# Altium PCB final test with protection.PcbDoc
Units mm, origin at the board's own origin, x right, y up, seen from the top; angles counter-clockwise.
Board outline 152.4 x 101.6 mm, 2 copper layers (Top Layer, Bottom Layer); 19 components, 30 nets, 84 pads, 0 vias.
Unrouted connection lines stored in the file: 53.
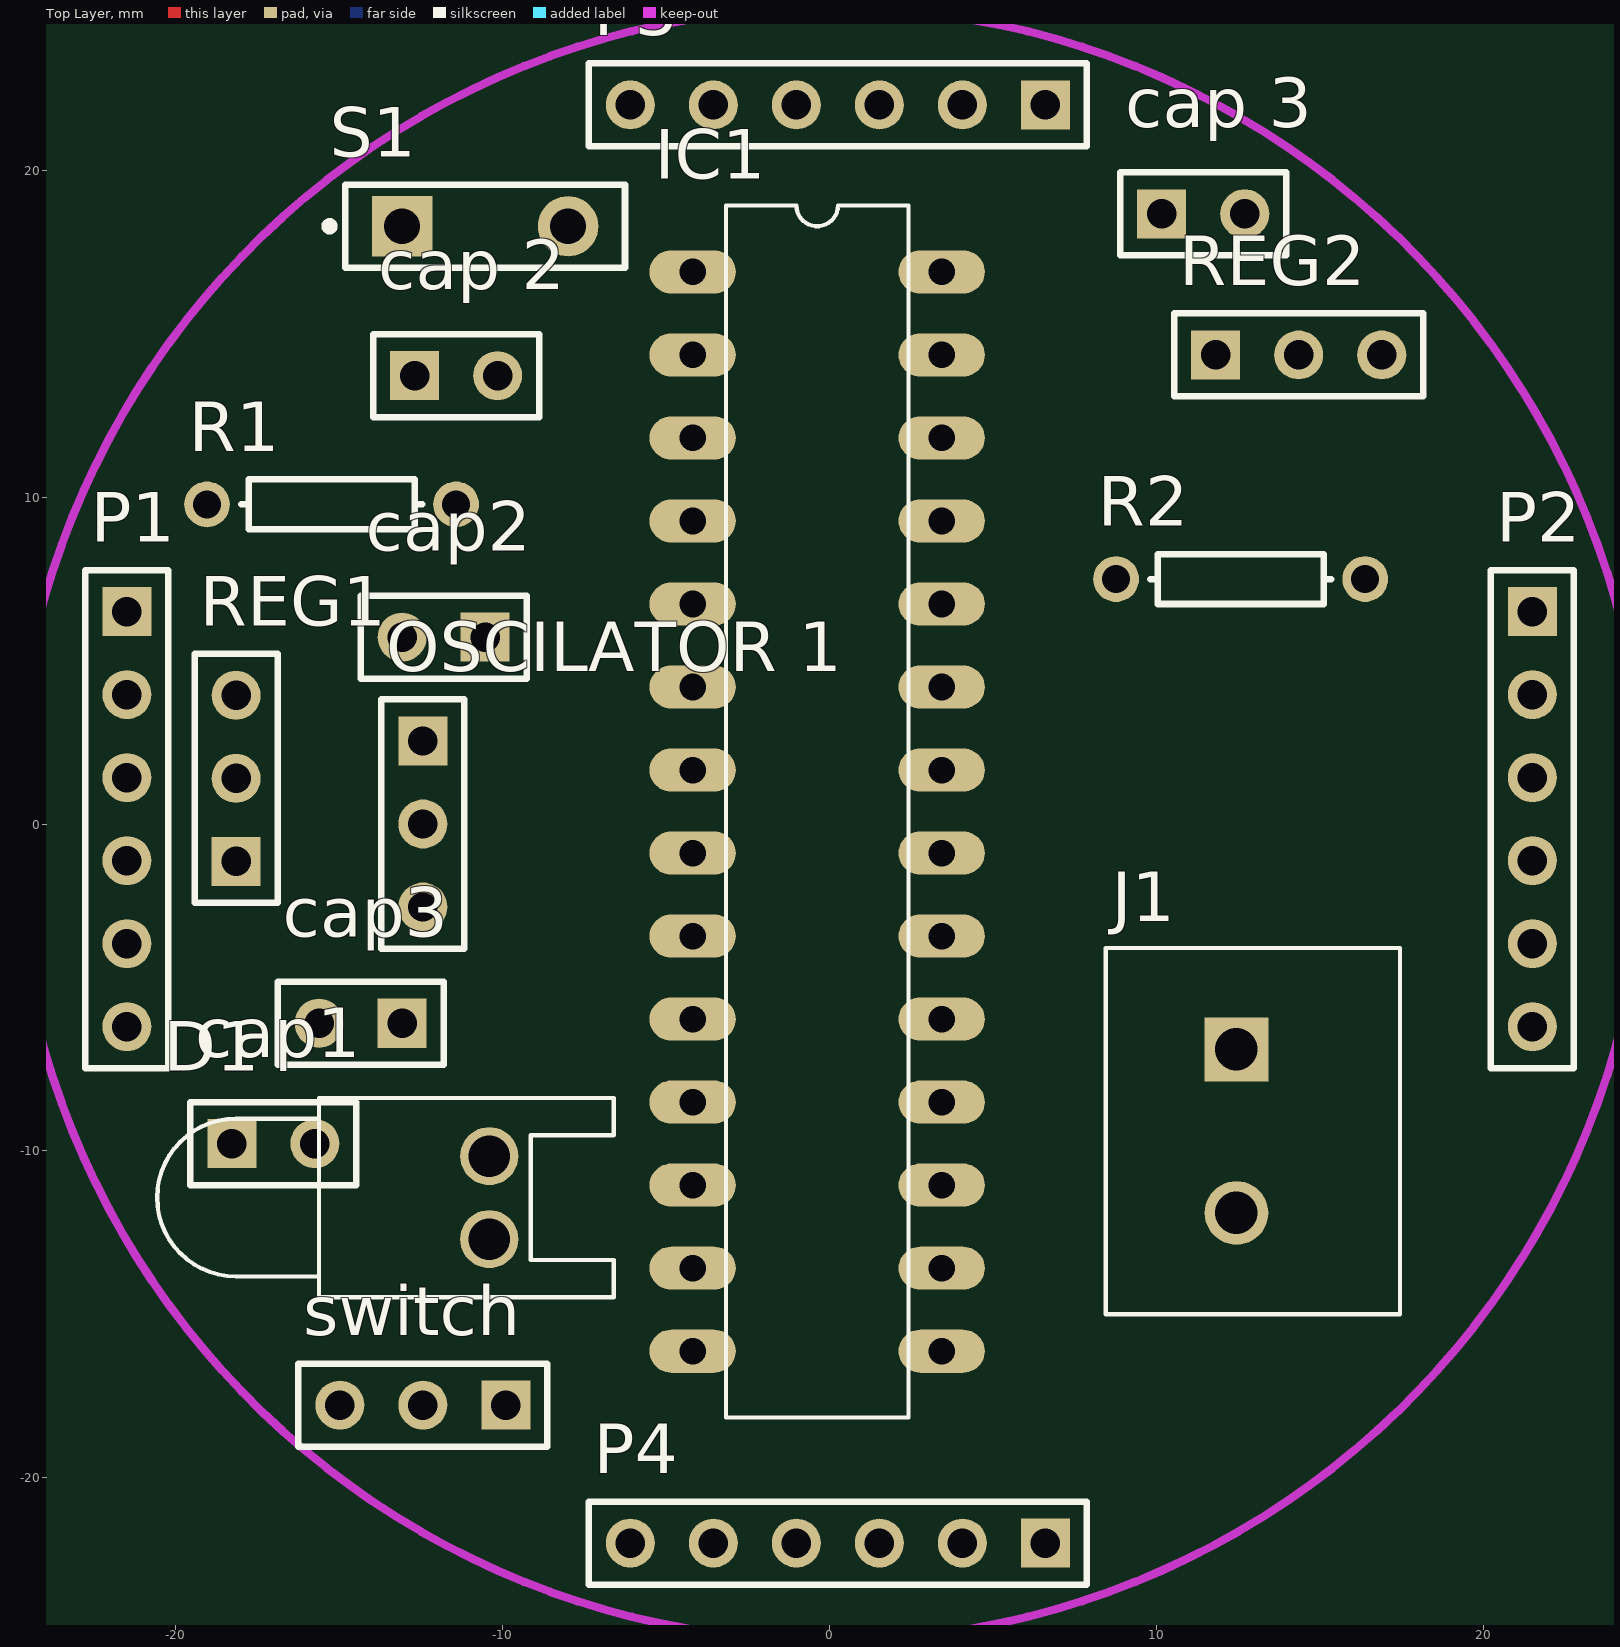
[diagram p0: Top Layer view]
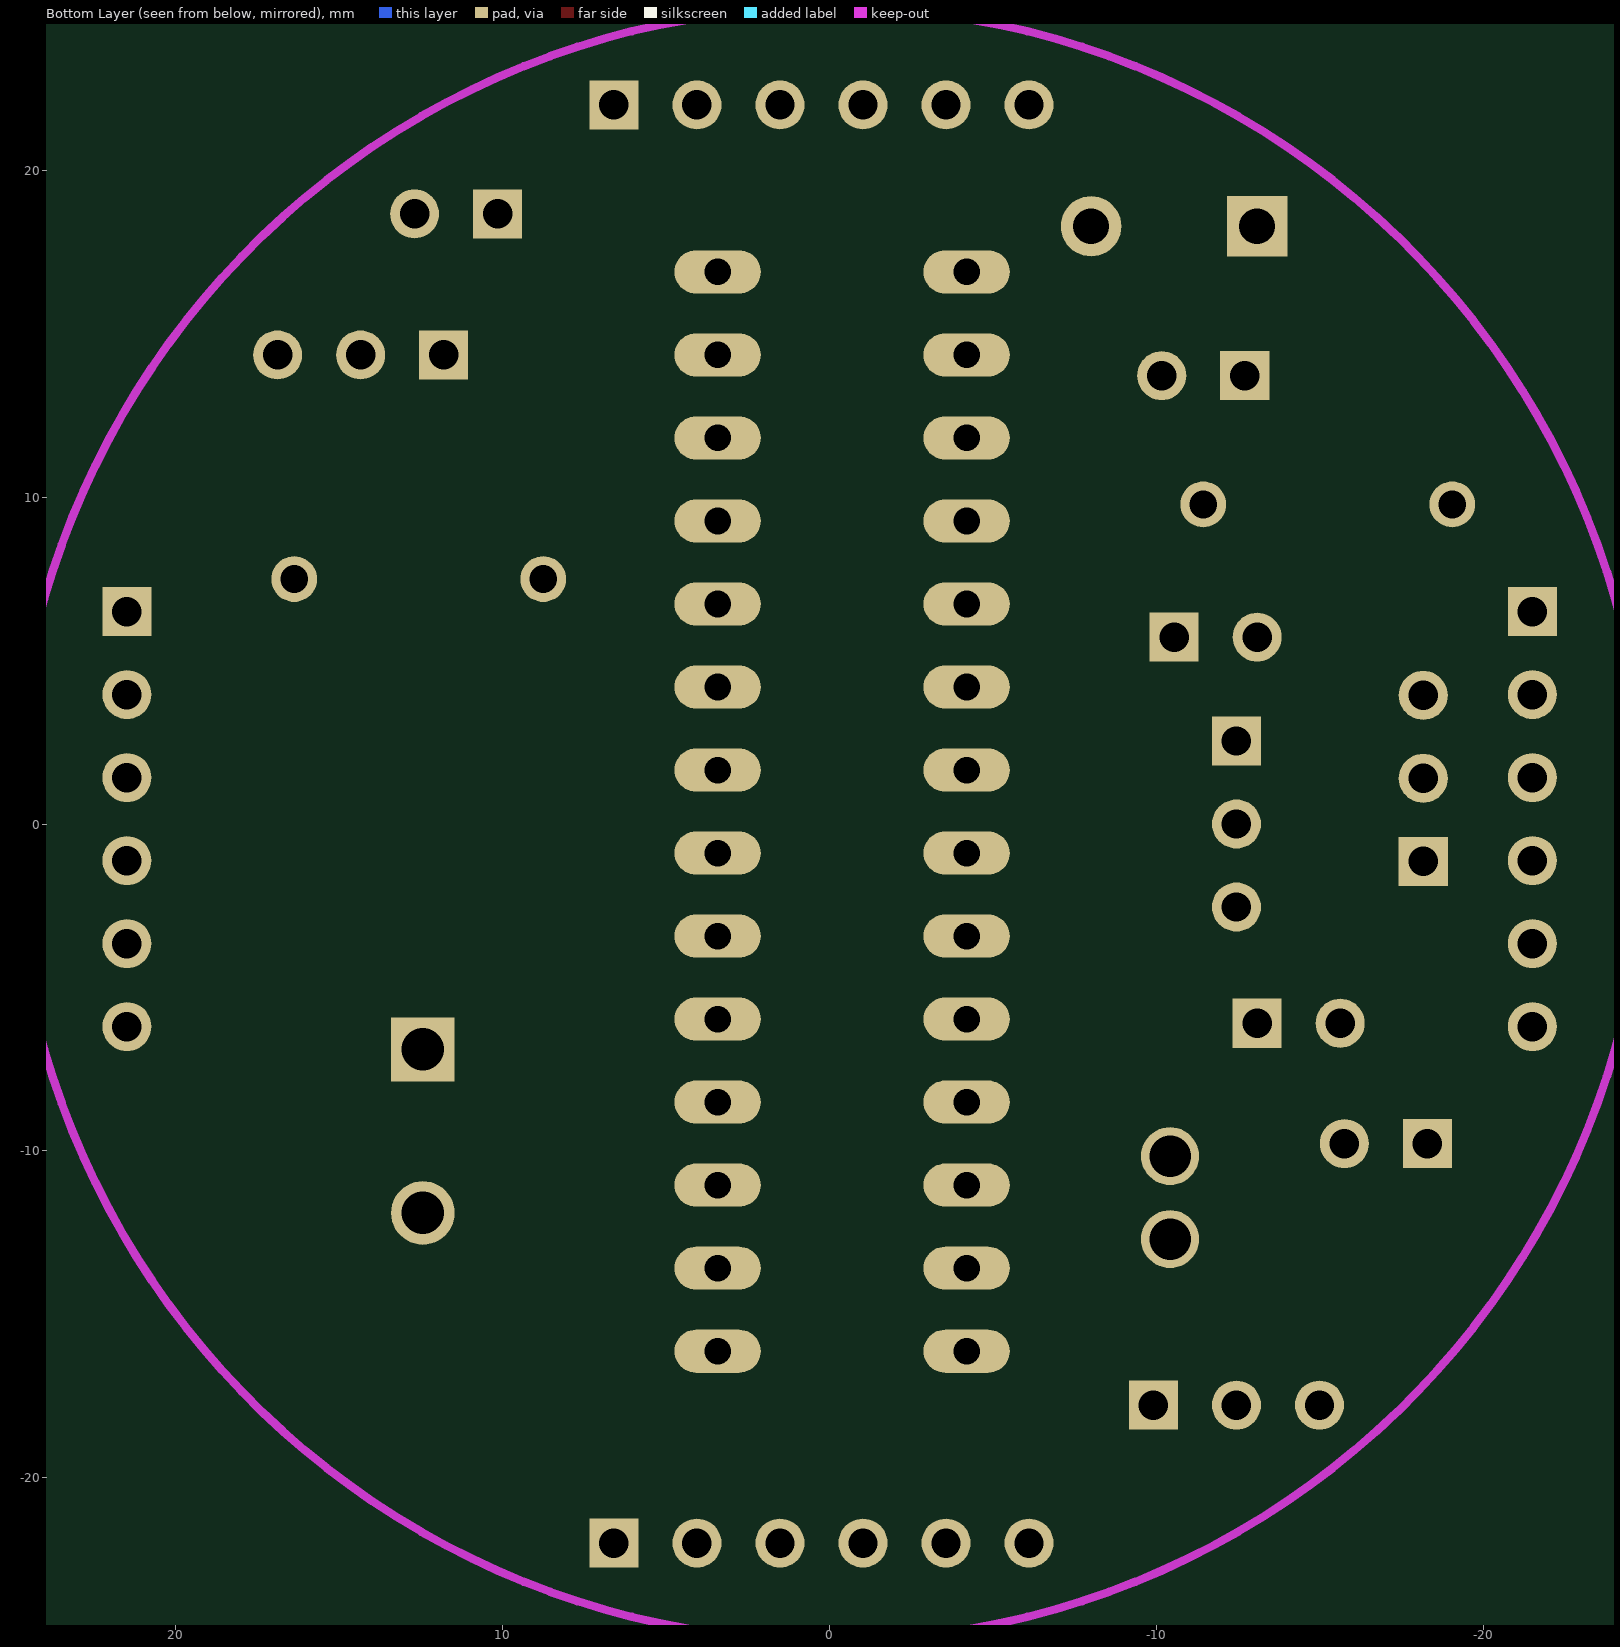
[diagram p1: Bottom Layer view, seen from below]

## Layer stack, top to bottom
Top Solder: solder mask 0.0102, Solder Resist, Dk 3.5
Top Layer: signal copper 0.036
Dielectric 1: dielectric 0.32, FR-4, Dk 4.8
Bottom Layer: signal copper 0.0356
Bottom Solder: solder mask 0.0102, Solder Resist, Dk 3.5

## Board outline
-74.168,-49.911 78.232,-49.911 78.232,51.689 -74.168,51.689

## Design rules (kind name [scope] priority, off if disabled: settings)
Clearance [All] p1: gap=0.5 ignorepadtopadclearanceinfootprint=FALSE
PolygonConnect [All] p1: connectstyle=Relief reliefconductorwidth=0.254 reliefentries=4 polygonreliefangle="90 Angle" airgapwidth=0.254
RoutingVias [All] p1: holewidth=0.711 width=1.27 viastyle="Through Hole" minholewidth=0.711 minwidth=1.27 maxholewidth=0.711 maxwidth=1.27
SolderMaskExpansion [All] p1: expansion=0.102
Width [All] p1: maxlimit=1 minlimit=0.5 preferedwidth=0.7
30 further rules are at their usual default settings.

## Components (designator, comment, footprint, x,y, rotation, side; value= is the part's Value field where it differs from the comment)
cap1 "Header 2" HDR1X2 -18.288,-9.779 r0 top
cap2 "Header 2" HDR1X2 -10.541,5.715 r180 top
cap3 "Header 2" HDR1X2 -13.081,-6.096 r180 top
"cap 2" "Header 2" HDR1X2 -12.7,13.716 r0 top
"cap 3" "Header 2" HDR1X2 10.16,18.669 r0 top
D1 "LED0" LED-0 -10.414,-11.43 r270 top
IC1 "ATMEGA328-PU" *DIL28 -0.381,0.381 r0 top
J1 "OSTTA020161" *OST_OSTTA020161 12.446,-9.398 r270 top
"OSCILATOR 1" "Header 3" HDR1X3 -12.446,2.54 r270 top
P1 "Header 6" HDR1X6 -21.5,6.5 r270 top
P2 "Header 6" HDR1X6 21.5,6.5 r270 top
P3 "Header 6" HDR1X6 6.6,22 r180 top
P4 "Header 6" HDR1X6 6.6,-22 r180 top
R1 "Res1" AXIAL-0.3 -15.24,9.779 r0 top value=1K
R2 "Res1" AXIAL-0.3 12.573,7.493 r0 top value=1K
REG1 "Header 3" HDR1X3 -18.161,-1.143 r90 top
REG2 "Header 3" HDR1X3 11.811,14.351 r0 top
S1 "SW-PB" SPST-2 -10.541,18.288 r0 top
switch "Header 3" HDR1X3 -9.906,-17.78 r180 top

## Footprints (in the part's own frame and the unit in brackets; to place one, negate y for a bottom-side part, rotate by r counter-clockwise, add the part's x,y. Pads: shape width x height; smd on the part's side, far side on the other; paste and mask are expansions set on the pad)
*DIL28 [mil]
  oval 104x52 hole 32: 1(-150,650) 2(-150,550) 3(-150,450) 4(-150,350) 5(-150,250) 6(-150,150) 7(-150,50) 8(-150,-50) 9(-150,-150) 10(-150,-250) 11(-150,-350) 12(-150,-450) 13(-150,-550) 14(-150,-650) 15(150,-650) 16(150,-550) 17(150,-450) 18(150,-350) 19(150,-250) 20(150,-150) 21(150,-50) 22(150,50) 23(150,150) 24(150,250) 25(150,350) 26(150,450) 27(150,550) 28(150,650)
  silkscreen extent -110,-730 110,730, body extent -199,-705 195,695, height 319
*OST_OSTTA020161 [mm]
  rect 1.95x1.95 hole 1.3: 1(-2.5,0)
  round 1.95 hole 1.3: 2(2.5,0)
  silkscreen extent -5.6,-4 5.6,5
AXIAL-0.3 [mm] "Axial Device, Thru-Hole; 2 Leads; 0.3 in Pin Spacing"
  round 1.4 hole 0.85: 1(-3.81,0) 2(3.81,0)
  silkscreen extent -2.77,-0.76 2.77,0.76
HDR1X2 [mm] "Connector; Header; 2 Position"
  rect 1.5x1.5 hole 0.9: 1(0,0)
  round 1.5 hole 0.9: 2(2.54,0)
  silkscreen extent -1.27,-1.27 3.81,1.27
HDR1X3 [mm] "Connector; Header; 3 Position"
  rect 1.5x1.5 hole 0.9: 1(0,0)
  round 1.5 hole 0.9: 2(2.54,0) 3(5.08,0)
  silkscreen extent -1.27,-1.27 6.35,1.27
HDR1X6 [mm] "Connector; Header; 6 Position"
  rect 1.5x1.5 hole 0.9: 1(0,0)
  round 1.5 hole 0.9: 2(2.54,0) 3(5.08,0) 4(7.62,0) 5(10.16,0) 6(12.7,0)
  silkscreen extent -1.27,-1.27 13.97,1.27
LED-0 [mil] "LED; 2 Leads"
  round 70 hole 50: 1(50,0) 2(-50,0)
  silkscreen extent -120,-400 120,150
SPST-2 [mm] "Switch; 2 Leads"
  rect 1.85x1.85 hole 1.1: 1(-2.54,0)
  round 1.85 hole 1.1: 2(2.54,0)
  silkscreen extent -4.89,-1.27 4.28,1.27

## Part data
cap1 cap2 cap3 "cap 2" "cap 3": "Header, 2-Pin", LatestRevisionDate=17-Jul-2002, LatestRevisionNote="Re-released for DXP Platform.", Publisher="Altium Limited"
D1: "Typical INFRARED GaAs LED", LatestRevisionDate=08-Jul-2005, LatestRevisionNote="Mech Layer 1 removed.", PackageDescription="LED; 2 Leads", PackageReference=LED-0, Published=8-Jun-2000, Publisher="Altium Limited"
IC1: "ATmega Series 20 MHz 32 KB Flash 2 KB SRAM 8-Bit Microcontroller - DIP-28", Package="PDIP-28 Microchip", Availability=Unavailable, MF=Microchip, MP=ATMEGA328-PU, Price=None, SnapEDA_Link=https://www.snapeda.com/parts/ATMEGA328-PU/Microchip/view-part/?ref=snap
J1: "Connector Terminal Blocks 2 Position 5mm Solder Straight Thru-Hole 16A", Package=None, Availability=Unavailable, MF="On Shore", MP=OSTTA020161, Price=None, SnapEDA_Link=https://www.snapeda.com/parts/OSTTA020161/On%20Shore%20Technology%20Inc./view-part/?ref=snap
"OSCILATOR 1" REG1 REG2 switch: "Header, 3-Pin", LatestRevisionDate=17-Jul-2002, LatestRevisionNote="Re-released for DXP Platform.", Publisher="Altium Limited"
P1 P2 P3 P4: "Header, 6-Pin", LatestRevisionDate=17-Jul-2002, LatestRevisionNote="Re-released for DXP Platform.", Publisher="Altium Limited"
R1 R2: "Resistor", LatestRevisionDate=17-Jul-2002, LatestRevisionNote="Re-released for DXP Platform.", PackageDescription="Axial Device, Thru-Hole; 2 Leads; 0.3 in Pin Spacing", PackageReference=AXIAL-0.3, Published=8-Jun-2000, Publisher="Altium Limited"
S1: "Switch", LatestRevisionDate=17-Jul-2002, LatestRevisionNote="Re-released for DXP Platform.", PackageDescription="Switch; 2 Leads", PackageReference=SPST-2, Published=24-Mar-1999, Publisher="Altium Limited"

## Nets (pads, with @x,y where several pads share a name; then routed paths per layer and width w, separated by ;. In a path a pad name is that pad's centre, name@x,y a point inside that pad or via, vN(x,y) a via of type N, cw(c..) or ccw(c..) an arc to the next point about the centre after c; other vN are vias at no path point)
"3.3 volt": "cap 3.2" P1.6 REG2.2
"5 volt": "cap 2.2" IC1.7 IC1.20 P1.5 R1.2 REG1.3 REG2.3
"Analog 0": IC1.23 P3.5
"Analog 1": IC1.24 P3.4
"Analog 2": IC1.25 P3.3
"Analog 3": IC1.26 P3.2
AREF: IC1.21 P3.6
BATTERY: J1.1 switch.3
CS: IC1.6 P1.4
"Digital 3": IC1.5 P3.1
"Digital 5": IC1.11 P4.1
"Digital 6": IC1.12 P4.2
"Digital 7": IC1.13 P4.3
"Digital 8": IC1.14 P4.4
"Digital 9": IC1.15 P4.5
"Digital 10": IC1.16 P4.6
GND: "cap 2.1" "cap 3.1" cap1.2 cap2.1 cap3.2 D1.2 IC1.8 IC1.22 J1.2 P2.1 REG1.2 REG2.1 S1.1 switch.1
INT: IC1.4 P1.3
MISO: IC1.18 P2.5
MOSI: IC1.17 P2.6
NetD1_1: D1.1 R2.2
"OSCILATOR 1": "OSCILATOR 1.1" cap2.2 IC1.9
"OSCILATOR 2": "OSCILATOR 1.3" cap3.1 IC1.10
RESET: IC1.1 R1.1 S1.2
RX: IC1.2 P1.1
SCK: IC1.19 P2.4
SCL: IC1.28 P2.2
SDA: IC1.27 P2.3
"Switch out": cap1.1 R2.1 REG1.1 switch.2
TX: IC1.3 P1.2
pads on no net: "OSCILATOR 1.2"

## Keep-outs
Keep-Out Layer:
  circle w0.254: c0,0 r25